# EAGLE board cn7macropad-pure (EAGLE 9.6.2)
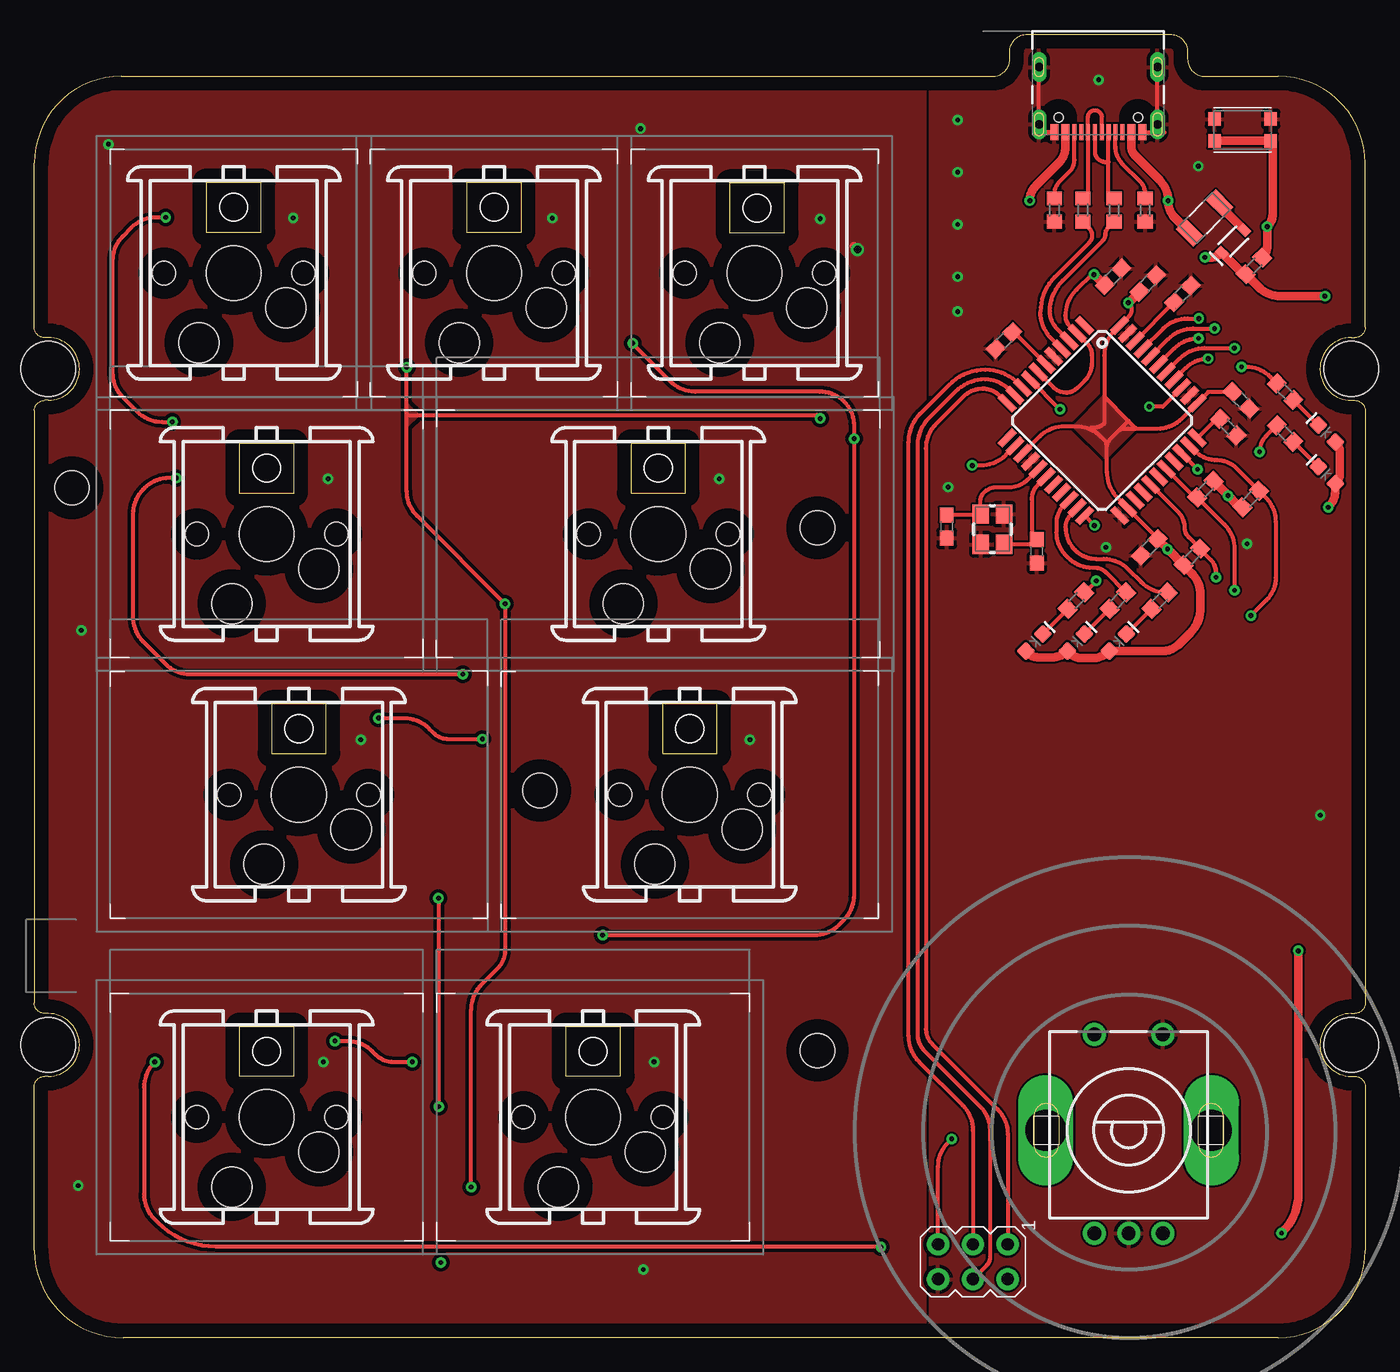
[diagram p0: board, top side]
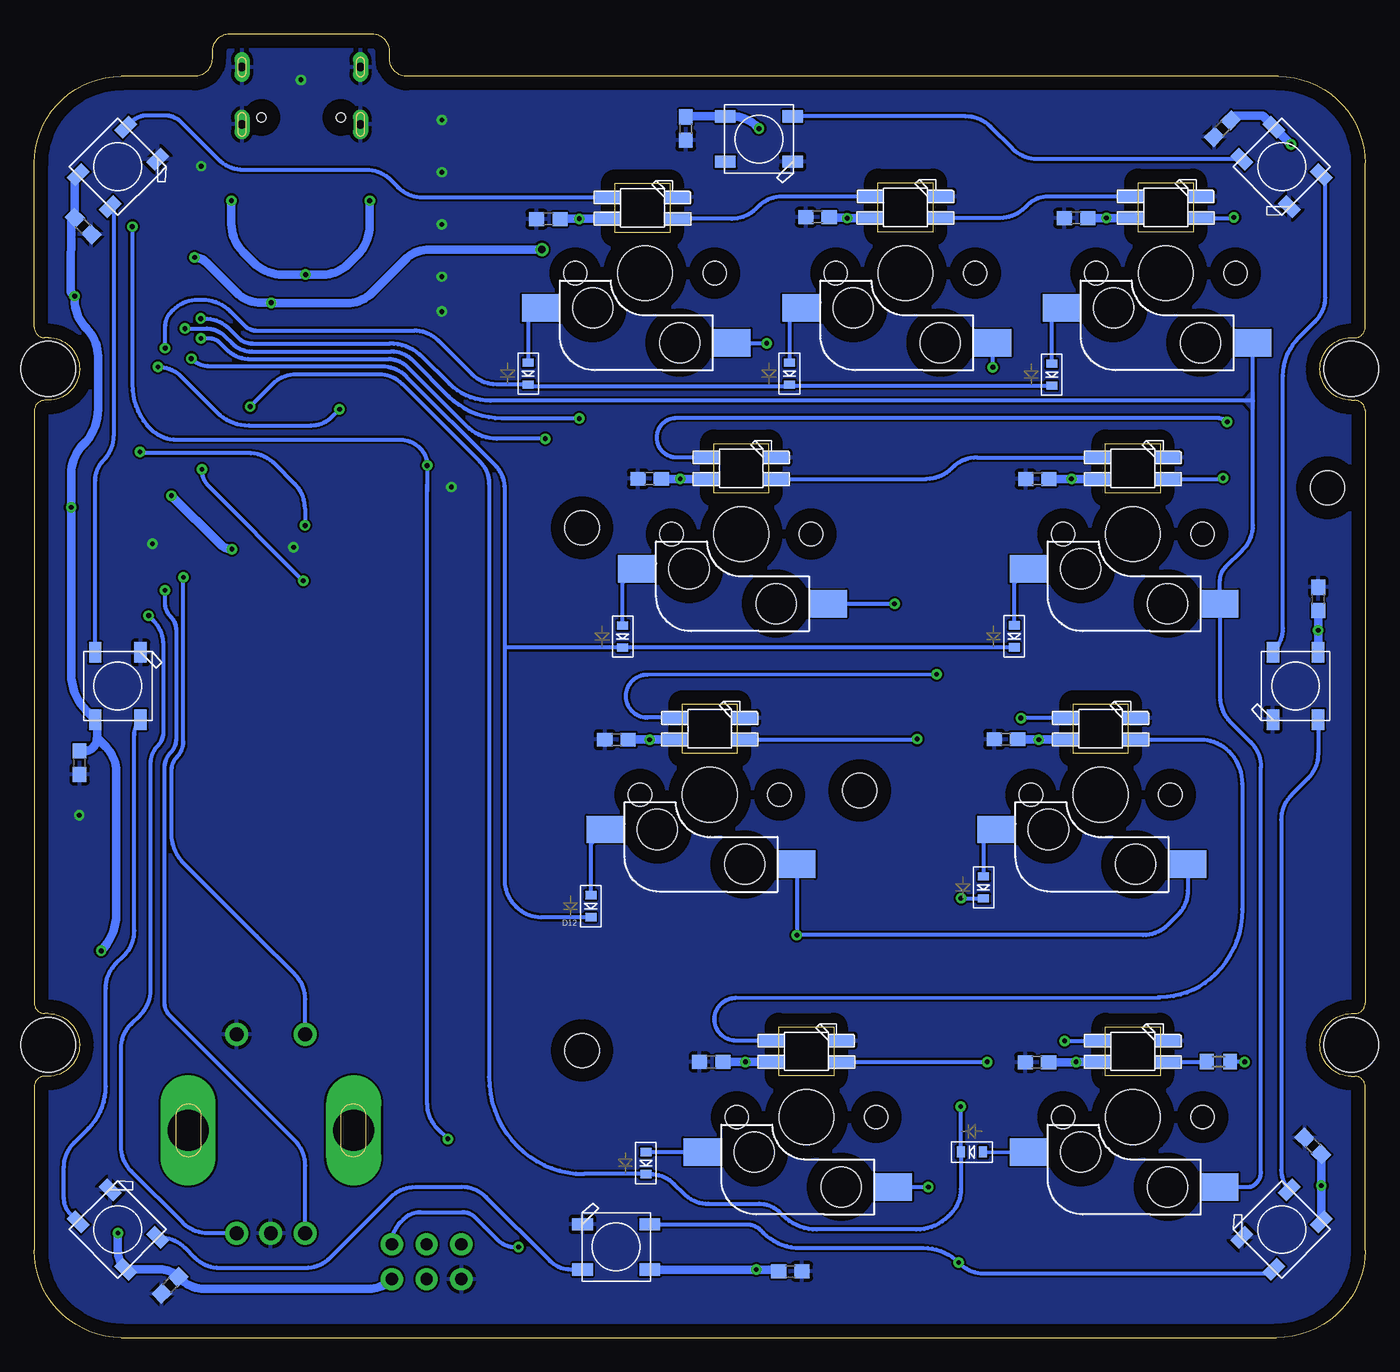
[diagram p1: board, bottom side, seen from below]

Size 97.03 x 95.01 mm. Coordinates in mm from the lower left corner, seen from the top.
Outline: 90.68,0 arc90 97.03,6.35 97.03,18.29 arc90 96.27,19.05 96.01,19.05 arc-90 93.73,21.34 arc-90 96.01,23.62 96.27,23.62 arc90 97.03,24.38 97.03,67.56 arc90 96.27,68.33 96.01,68.33 arc-90 93.73,70.61 arc-90 96.01,72.9 96.27,72.9 arc90 97.03,73.66 97.03,85.6 arc90 90.68,91.95 85.34,91.95 arc-90 84.07,93.22 84.07,93.74 arc90 82.8,95.01 72.39,95.01 arc90 71.12,93.74 71.12,93.22 arc-90 69.85,91.95 6.35,91.95 arc90 0,85.6 0,73.66 arc90 0.76,72.9 1.02,72.9 arc-90 3.3,70.61 arc-90 1.02,68.33 0.76,68.33 arc90 0,67.56 0,24.38 arc90 0.76,23.62 1.02,23.62 arc-90 3.3,21.34 arc-90 1.02,19.05 0.76,19.05 arc90 0,18.29 0,6.35 arc90 6.48,0 90.68,0
Copper layers (1*16): Top 0.035mm / dielectric 1.5mm / Bottom 0.035mm
Design rules "default *": minimum track width 6mil, minimum drill 0.35mm, track to track 6mil, track to pad 6mil, pad to pad 6mil, via to via 6mil, smd to smd 6mil, copper to edge 40mil, drill to drill 6mil, minimum pad ring 10mil, minimum via ring 8mil, stop-mask expansion 4mil, vias tented up to drill 20mil, thermal gap 10mil
Holes 2.5 mm at 36.86,39.88 57.1,59.03 57.1,20.93 2.74,61.95
Holes 4 mm at 1.02,70.61 1.02,21.34 96.01,70.61 96.01,21.34

## Footprints (pad centres in the part's own frame; a part is rotated, then mirrored left to right if it is on the bottom)
0603 = smd 1.1 x 1: 1 -0.85,0; 2 0.85,0
SOD-323 = smd 0.63 x 0.83: A 1.15,0; C -1.15,0
LED-0603 = smd 1 x 1: A -0.877,0; C 0.877,0
SOD-523 = smd 0.8 x 0.6: A 0,-0.8; K 0,0.8
AVRISP = drill 0.9 pad 1.626: 1 -1.27,2.54; 2 1.27,2.54; 3 -1.27,0; 4 1.27,0; 5 -1.27,-2.54; 6 1.27,-2.54
GCT_USB4105_REVA = smd 0.6 x 1.15: A1/B12 -3.2,4.755; A4/B9 -2.4,4.755; B1/A12 3.2,4.755; B4/A9 2.4,4.755 | smd 0.3 x 1.15: A5 -1.25,4.755; A6 -0.25,4.755; A7 0.25,4.755; A8 1.25,4.755; B5 1.75,4.755; B6 0.75,4.755; B7 -0.75,4.755; B8 -1.75,4.755 | drill 0.6 pad 1 long: G1 -4.32,0; G2 4.32,0 | drill 0.6 pad 1.05 long: G3 -4.32,4.18; G4 4.32,4.18 | hole 0.65: 2.89,3.68; -2.89,3.68
SK6812-MINI-E = smd 1.8 x 0.82 bottom: 1-VDD -2.57,0.78; 2-DOUT -2.57,-0.78; 3-GND 2.57,-0.78; 4-DIN 2.57,0.78
WS2812B = smd 1.5 x 0.9: 1-VDD 2.45,-1.65; 2-DOUT 2.45,1.65; 3-GND -2.45,1.65; 4-DIN -2.45,-1.65
R0603 = smd 1 x 1.1: 1 -0.85,0; 2 0.85,0
SW_KMR621NGLFS = smd 0.9 x 1: 1_1 -2.05,0.8; 1_2 2.05,0.8; 2_1 -2.05,-0.8; 2_2 2.05,-0.8
SWITCH_SOCKET-1.25U = smd 2.7 x 2 bottom: 1 6.355,5.08; 2 -7.625,2.54 | hole 4: 0,0 | hole 2.93: -3.81,2.54; 2.54,5.08 | hole 1.7: -5.08,0; 5.08,0
SWITCH_SOCKET-1.5U = smd 2.7 x 2 bottom: 1 6.355,5.08; 2 -7.625,2.54 | hole 4: 0,0 | hole 2.93: -3.81,2.54; 2.54,5.08 | hole 1.7: -5.08,0; 5.08,0
SWITCH_SOCKET-1.75U = smd 2.7 x 2 bottom: 1 6.355,5.08; 2 -7.625,2.54 | hole 4: 0,0 | hole 2.93: -3.81,2.54; 2.54,5.08 | hole 1.7: -5.08,0; 5.08,0
SWITCH_SOCKET-1U = smd 2.7 x 2 bottom: 1 6.355,5.08; 2 -7.625,2.54 | hole 4: 0,0 | hole 2.93: -3.81,2.54; 2.54,5.08 | hole 1.7: -5.08,0; 5.08,0
EC11B-V = drill 1 pad 1.676: A -2.5,-7.5; B 2.5,-7.5; C 0,-7.5; D -2.5,7; E 2.5,7 | drill 3 pad 3.3 long: G1 -6.032,0; G2 6.032,0
TQFP44 = smd 1.5 x 0.5: 1 -5.8,4; 2 -5.8,3.2; 3 -5.8,2.4; 4 -5.8,1.6; 5 -5.8,0.8; 6 -5.8,0; 7 -5.8,-0.8; 8 -5.8,-1.6; 9 -5.8,-2.4; 10 -5.8,-3.2; 11 -5.8,-4; 23 5.8,-4; 24 5.8,-3.2; 25 5.8,-2.4; 26 5.8,-1.6; 27 5.8,-0.8; 28 5.8,0; 29 5.8,0.8; 30 5.8,1.6; 31 5.8,2.4; 32 5.8,3.2; 33 5.8,4 | smd 0.5 x 1.5: 12 -4,-5.8; 13 -3.2,-5.8; 14 -2.4,-5.8; 15 -1.6,-5.8; 16 -0.8,-5.8; 17 0,-5.8; 18 0.8,-5.8; 19 1.6,-5.8; 20 2.4,-5.8; 21 3.2,-5.8; 22 4,-5.8; 34 4,5.8; 35 3.2,5.8; 36 2.4,5.8; 37 1.6,5.8; 38 0.8,5.8; 39 0,5.8; 40 -0.8,5.8; 41 -1.6,5.8; 42 -2.4,5.8; 43 -3.2,5.8; 44 -4,5.8
PTC1206 = smd 1.06 x 1.82: 1 -1.528,0; 2 1.528,0
CRYSTAL-SMD-3.2X2.5MM = smd 1.4 x 1.2: 1 -1.1,-0.85; 2 1.1,-0.85; 3 1.1,0.85; 4 -1.1,0.85

## Placement (x,y rotation side)
C1  10uF  [0603]  87.96,68.33 315 top
C2  1.0uF  [0603]  78.65,77.34 45 top
C3  1.0uF  [0603]  83.7,76.09 45 top
C4  1.0uF  [0603]  70.7,72.69 225 top
C5  1.0uF  [0603]  81.18,76.84 45 top
C6  1.0uF  [0603]  81.29,57.61 225 top
C7  22pF  [0603]  73.09,57.33 90 top
C8  22pF  [0603]  66.52,59.12 90 top
C9  0.1uf  [0603]  93.47,81.03 135 bottom
C10  0.1uf  [0603]  93.73,41.91 90 bottom
C11  0.1uf  [0603]  87.12,3.81 45 bottom
C12  0.1uf  [0603]  3.81,13.97 315 bottom
C13  0.1uf  [0603]  3.43,53.85 270 bottom
C14  0.1uf  [0603]  41.91,4.83 180 bottom
C15  0.1uf  [0603]  10.41,88.14 45 bottom
C16  0.1uf  [0603]  23.93,20.07 0 bottom
C17  0.1uf  [0603]  47.68,20.09 0 bottom
C18  0.1uf  [0603]  26.19,43.61 0 bottom
C19  0.1uf  [0603]  54.58,43.59 0 bottom
C20  0.1uf  [0603]  23.9,62.59 0 bottom
C21  0.1uf  [0603]  52.17,62.61 0 bottom
C22  0.1uf  [0603]  21.08,81.61 0 bottom
C23  0.1uf  [0603]  39.93,81.69 0 bottom
C24  0.1uf  [0603]  59.56,81.53 0 bottom
C25  0.1uf  [0603]  49.53,88.14 90 bottom
D1  3A/10V/280mV  [SOD-323]  87.4,79.91 45 top
D2  [LED-0603]  75.95,50.67 45 top
D3  [LED-0603]  78.99,50.67 45 top
D4  [LED-0603]  94.23,62.86 135 top
D5  [SOD-523]  22.85,70.21 180 bottom
D6  [SOD-523]  25.59,51.13 180 bottom
D7  [SOD-523]  28.68,13.53 90 bottom
D8  [SOD-523]  52.44,12.73 180 bottom
D9  [SOD-523]  54.14,51.1 180 bottom
D10  [SOD-523]  41.97,70.28 180 bottom
D11  [SOD-523]  61.02,70.28 180 bottom
D12  [SOD-523]  56.45,31.45 180 bottom
D13  [SOD-523]  27.83,32.82 180 bottom
D14  [LED-0603]  72.9,50.67 45 top
D15  [LED-0603]  94.23,65.91 135 top
ISP1  AVRISP-6  [AVRISP]  68.43,5.52 270 top
J2  USB4105_REVA  [GCT_USB4105_REVA]  77.57,92.62 180 top
LED_1  [SK6812-MINI-E]  16.94,20.86 180 top
LED_2  [SK6812-MINI-E]  40.74,20.86 180 top
LED_3  [SK6812-MINI-E]  19.29,44.38 180 top
LED_4  [SK6812-MINI-E]  47.79,44.38 180 top
LED_5  [SK6812-MINI-E]  16.94,63.38 180 top
LED_6  [SK6812-MINI-E]  45.49,63.38 180 top
LED_7  [SK6812-MINI-E]  14.54,82.4 180 top
LED_8  [SK6812-MINI-E]  33.51,82.4 180 top
LED_9  [SK6812-MINI-E]  52.7,82.34 180 top
LED_10  WS2812B5050  [WS2812B]  90.93,85.34 225 bottom
LED_11  WS2812B5050  [WS2812B]  90.93,47.5 270 bottom
LED_12  WS2812B5050  [WS2812B]  90.93,7.87 315 bottom
LED_13  WS2812B5050  [WS2812B]  54.61,6.6 0 bottom
LED_14  WS2812B5050  [WS2812B]  6.1,7.87 45 bottom
LED_15  WS2812B5050  [WS2812B]  5.08,47.5 90 bottom
LED_16  WS2812B5050  [WS2812B]  6.1,85.34 135 bottom
LED_17  WS2812B5050  [WS2812B]  44.2,87.38 180 bottom
R1  5.1k  [R0603]  74.37,82.19 270 top
R2  5.1k  [R0603]  80.98,82.19 270 top
R3  22  [R0603]  76.45,82.19 270 top
R4  22  [R0603]  78.72,82.19 270 top
R5  10k  [R0603]  88.92,78.13 45 top
R6  10k  [R0603]  88.68,61.14 225 top
R7  10k  [R0603]  85.38,61.85 45 top
R8  10k  [R0603]  84.39,56.92 225 top
R9  500  [R0603]  10.69,20.12 180 bottom
R10  200  [R0603]  78.99,53.72 225 top
R11  200  [R0603]  82.04,53.72 225 top
R12  200  [R0603]  91.19,65.91 315 top
R13  10k  [R0603]  87.05,66.37 315 top
R14  200  [R0603]  91.19,68.96 315 top
R15  200  [R0603]  75.95,53.72 225 top
S2  KMR621NGLFS  [SW_KMR621NGLFS]  88.09,88.04 0 top
SW1  KAILH1.25U  [SWITCH_SOCKET-1.25U]  16.94,16.06 180 top
SW2  KAILH1.25U  [SWITCH_SOCKET-1.25U]  40.74,16.06 180 top
SW3  KAILH1.5U  [SWITCH_SOCKET-1.5U]  19.29,39.58 180 top
SW4  KAILH1.5U  [SWITCH_SOCKET-1.5U]  47.79,39.58 180 top
SW5  KAILH1.25U  [SWITCH_SOCKET-1.25U]  16.94,58.58 180 top
SW6  KAILH1.75U  [SWITCH_SOCKET-1.75U]  45.49,58.58 180 top
SW7  KAILH  [SWITCH_SOCKET-1U]  14.54,77.6 180 top
SW8  KAILH  [SWITCH_SOCKET-1U]  33.51,77.6 180 top
SW9  KAILH  [SWITCH_SOCKET-1U]  52.51,77.6 180 top
SW10  EC11B-V-T  [EC11B-V]  79.78,15.11 0 top
U1  32U4  [TQFP44]  77.86,66.85 315 top
U$1  PTC-FUSE  [PTC1206]  85.32,81.61 45 top
Y2  [CRYSTAL-SMD-3.2X2.5MM]  69.85,58.93 90 top

## Library data of the parts
C1-C25 = kailh_cn7; PROD_ID: CAP-07876
D1 = SparkFun-DiscreteSemi; PROD_ID: DIO-14072
D2 = SparkFun-LED
D3-D11 D14 D15 LED_1-LED_9 LED_11-LED_17 R1-R15 SW1-SW10 U$1 Y2 = kailh_cn7
D12 D13 ISP1 = adafruit
J2 = USB4105_REVA; DESCRIPTION: USB-C (USB TYPE-C) USB 2.0 Receptacle Connector 24 (16+8 Dummy) Position Surface Mount, Right Angle; Through Hole; DIGI-KEY_PART_NUMBER: 2073-USB4105-GF-ACT-ND; MF: Global Connector Technology; MP: USB4105; PACKAGE: Package; PURCHASE-URL: https://pricing.snapeda.com/search/part/USB4105/?ref=eda
LED_10 = kailh_cn7; SPICEPREFIX: E
S2 = KMR621NGLFS; DESCRIPTION: Tactile Switch SPST-NO Top Actuated Surface Mount; DIGI-KEY_PART_NUMBER: CKN10684CT-ND; MF: C&K; MP: KMR621NG LFS; PACKAGE: None; PURCHASE-URL: https://pricing.snapeda.com/search/part/KMR621NG LFS/?ref=eda
U1 = SparkFun-IC-Microcontroller; PROD_ID: IC-11161

## Nets
+5V: C1.1 C5.1 C6.1 C9.2 C10.2 C11.2 C12.2 C13.2 C14.2 C15.2 C16.2 C17.2 C18.2 C19.2 C20.2 C21.2 C22.2 C23.2 C24.2 C25.2 D1.C D2.A D3.A D4.A D14.A D15.A ISP1.2 LED_1.1-VDD LED_2.1-VDD LED_3.1-VDD LED_4.1-VDD LED_5.1-VDD LED_6.1-VDD LED_7.1-VDD LED_8.1-VDD LED_9.1-VDD LED_10.1-VDD LED_11.1-VDD LED_12.1-VDD LED_13.1-VDD LED_14.1-VDD LED_15.1-VDD LED_16.1-VDD LED_17.1-VDD R5.1 R6.2 R7.2 R8.2 U1.14 U1.24 U1.34 U1.44
AREF: C3.1 U1.42
CC1: J2.A5 R2.1
CC2: J2.B5 R1.1
COL0: SW1.1 SW5.1 SW7.1 U1.41
COL1: SW2.1 SW6.1 SW8.1 U1.40
COL2: SW3.1 SW4.1 SW9.1 U1.39
D+: J2.A6 J2.B6 R3.1
D-: J2.A7 J2.B7 R4.1
D_N: R4.2 U1.3
D_P: R3.2 U1.4
GND: C1.2 C2.2 C3.2 C4.2 C5.2 C6.2 C7.1 C8.1 C9.1 C10.1 C11.1 C12.1 C13.1 C14.1 C15.1 C16.1 C17.1 C18.1 C19.1 C20.1 C21.1 C22.1 C23.1 C24.1 C25.1 ISP1.6 J2.A1/B12 J2.B1/A12 J2.G1 J2.G2 J2.G3 J2.G4 LED_1.3-GND LED_2.3-GND LED_3.3-GND LED_4.3-GND LED_5.3-GND LED_6.3-GND LED_7.3-GND LED_8.3-GND LED_9.3-GND LED_10.3-GND LED_11.3-GND LED_12.3-GND LED_13.3-GND LED_14.3-GND LED_15.3-GND LED_16.3-GND LED_17.3-GND R1.2 R2.2 R13.2 S2.1_1 S2.1_2 SW10.C SW10.E U1.5 U1.15 U1.23 U1.35 U1.43 Y2.2 Y2.4
IN-BACKLIGHT: LED_9.2-DOUT LED_10.4-DIN
LD1: R15.1 U1.31
LD2: R10.1 U1.20
LD3: R11.1 U1.21
MISO: ISP1.1 R9.1 U1.11
MOSI: ISP1.4 U1.10
N$1: R13.1 U1.33
N$2: LED_1.2-DOUT LED_2.4-DIN
N$3: D15.C R14.2
N$4: LED_2.2-DOUT LED_3.4-DIN
N$5: D14.C R15.2
N$7: D1.A U$1.2
N$8: LED_1.4-DIN R9.2
N$9: LED_3.2-DOUT LED_4.4-DIN
N$10: C7.2 U1.17 Y2.1
N$11: C8.2 U1.16 Y2.3
N$12: LED_4.2-DOUT LED_5.4-DIN
N$13: LED_5.2-DOUT LED_6.4-DIN
N$14: LED_6.2-DOUT LED_7.4-DIN
N$15: D5.A SW7.2
N$16: D6.A SW5.2
N$17: D9.A SW6.2
N$18: D10.A SW8.2
N$19: D7.A SW1.2
N$20: D8.A SW2.2
N$21: D13.A SW3.2
N$22: D12.A SW4.2
N$23: D11.A SW9.2
N$24: LED_7.2-DOUT LED_8.4-DIN
N$25: LED_8.2-DOUT LED_9.4-DIN
N$26: D2.C R10.2
N$27: D3.C R11.2
N$28: LED_10.2-DOUT LED_11.4-DIN
N$29: LED_11.2-DOUT LED_12.4-DIN
N$30: LED_13.2-DOUT LED_14.4-DIN
N$31: LED_14.2-DOUT LED_15.4-DIN
N$32: D4.C R12.2
N$33: LED_15.2-DOUT LED_16.4-DIN
N$34: LED_16.2-DOUT LED_17.4-DIN
N$35: LED_12.2-DOUT LED_13.4-DIN
PB5: R7.1 SW10.A U1.29
PC7: R6.1 SW10.B U1.32
PD7: R8.1 SW10.D U1.27
PE6: U1.1
ROW0: D5.K D10.K D11.K U1.38
ROW1: D6.K D9.K D12.K U1.37
ROW2: D7.K D8.K D13.K U1.36
RST: ISP1.5 R5.2 S2.2_1 S2.2_2 U1.13
RXLED: R14.1 U1.8
SCK: ISP1.3 U1.9
TXLED: R12.1 U1.22
UCAP: C4.1 U1.6
VBUS: C2.1 J2.A4/B9 J2.B4/A9 U1.2 U1.7 U$1.1

## Tracks (layer width: path | path; a pad name or v marks a point on that pad's centre or on a via)
+5V  (via drill 0.35, 0.55)
  Top 0.305: U1.24 79.87,60.49 | 80.28,66.31 79.78,66.82 | 79.78,66.82 78.01,68.59 | C1.1 85.59,68.93 U1.34 83.65,66.99 arc-45 81.85,66.24 79.32,66.24 arc45 79.11,66.15 | 78.12,65.17 78.19,65.23 | 78.19,65.23 78.39,65.43 | 78.39,65.43 79.11,66.15 | 79.11,66.15 79.78,66.82 | 79.78,66.82 | 77.72,65.7 77.08,66.34 77.3,66.34 arc45 77.98,66.62 arc45 78,66.69 78,71.61 arc-45 78.75,73.4 U1.44 | 87.81,60.43 R6.2 | C6.1 81.89,58.29 U1.24 | U1.24 79.02,61.17 arc-45 78.21,63.12 78.21,65 arc-45 78.39,65.43 | U1.14 73.31,65.7 arc-45 75.11,66.45 75.92,66.45 arc-45 77.72,65.7 | 77.72,65.7 78.19,65.23 | U1.44 79.33,73.98 | U1.44 79.45,74.11 | U1.44 79.82,74.48 arc45 80.01,74.93 arc45 79.8,75.44 79.79,75.45
  Top 0.61: C6.1 81.89,58.11 81.99,58.11 v82.62,57.48 83.78,56.32 arc45 R8.2 84.36,55.75 arc-45 85.01,54.18 85.01,53.17 arc-45 84.27,51.38 83.39,50.49 arc-45 82.32,50.05 D3.A arc-45 77.11,49.53 76.33,49.53 arc-45 75.51,49.87 D2.A arc-45 74.19,49.58 73.25,49.58 arc-45 72.39,49.94 D14.A | v60.02,79.32 59.77,79.58 | R7.2 87.01,61.42 arc-45 v87.03,61.38 87.72,60.69 arc45 R6.2 | v92.15,28.19 92.15,10.43 arc-45 91.03,7.71 v90.93,7.62 | v94.08,75.92 90.85,75.92 arc-45 89.27,76.58 R5.1 arc-45 88.04,77.64 D1.C arc-45 85.73,78.74 v85.34,78.74 | C5.1 79.79,75.45 arc-45 v79.76,75.44 | v94.34,60.53 arc45 94.85,61.78 D4.A arc45 95.17,63.02 95.17,64.52 arc45 D15.A
  Bottom 0.61: v5.41,87 LED_16.1-VDD 7.48,89.06 9.49,89.06 C15.2 | LED_10.1-VDD 94.09,84.52 C9.2 94.35,81.35 94.37,77.09 94.36,77.09 94.36,76.2 v94.08,75.92 94.08,75.65 arc-45 93.22,73.56 arc45 92.38,71.54 92.38,67.68 arc45 93.45,65.1 arc-45 94.34,62.95 v94.34,60.53 94.34,48.39 arc-45 93.21,45.68 LED_11.1-VDD 92.46,44.92 92.46,43.7 | LED_13.1-VDD v44.4,4.95 42.91,4.95 arc45 42.87,4.94 C14.2 | v3.2,11.07 LED_14.1-VDD | LED_14.1-VDD 3.05,8.59 | 2.94,8.7 LED_14.1-VDD | LED_15.1-VDD v3.43,51.56 C13.2 | 47.01,89.03 LED_17.1-VDD | 93.61,42.67 C10.2 93.38,42.76 arc-45 92.73,43.03 arc-45 92.46,43.7 | LED_9.1-VDD 57.27,81.56 v57.3,81.56 58.69,81.56 C24.2 | LED_7.1-VDD v18.87,81.62 C22.2 | C23.2 39.03,81.64 37.8,81.64 v37.77,81.61 37.76,81.62 LED_8.1-VDD | LED_5.1-VDD 21.4,62.6 | 21.4,62.6 v21.41,62.61 | C20.2 21.41,62.59 21.4,62.6 | LED_6.1-VDD 49.92,62.6 | 49.92,62.6 v49.94,62.61 | C21.2 51.31,62.6 49.92,62.6 | LED_3.1-VDD 23.79,43.6 | 23.79,43.6 v23.8,43.59 | C18.2 25.33,43.6 23.79,43.6 | LED_4.1-VDD 52.16,43.6 v52.17,43.59 C19.2 | LED_1.1-VDD v21.07,20.08 | v21.07,20.08 v21.08,20.09 | C16.2 21.09,20.07 v21.07,20.08 | LED_2.1-VDD v45.18,20.08 | v45.18,20.08 v45.19,20.09 | C17.2 v45.18,20.08 | v60.02,79.32 68.21,79.32 arc-45 70.01,78.58 72.43,76.16 arc45 74.23,75.41 79.69,75.41 arc45 v79.76,75.44 80.48,75.44 arc45 82.28,76.18 | v82.62,57.48 arc45 83.49,57.84 v87.03,61.38 | 71.12,4.1 ISP1.2 arc45 72.65,3.56 84.61,3.56 arc45 86.41,4.3 C11.2 arc-45 87.88,4.98 LED_12.1-VDD | LED_12.1-VDD 90.12,4.73 | LED_12.1-VDD arc45 90.93,6.34 v90.93,7.62 | v44.2,88.14 44.34,88.28 arc-45 46.14,89.03 LED_17.1-VDD | LED_17.1-VDD 49.44,89.03 arc-45 C25.2
  Bottom 0.61: 92.46,43.7 91.8,43.05 arc45 91.06,41.25 91.06,30.85 arc45 92.15,28.21 v92.15,28.19 | LED_14.1-VDD 3.2,13.34 arc-45 C12.2 | v85.34,78.74 arc45 84.48,78.38 82.28,76.18 | 82.25,76.16 82.28,76.18
  pour Top (isolate 0.254, rank 2): -4.2,94.77 -4.2,0.1 64.94,0.1 64.94,94.77
  pour Top: 75.82,66.42 78.11,64.14 80.26,66.29 77.98,68.58
AREF
  Top 0.305: U1.42 C3.1 arc45 C3.1
CC1
  Top 0.305: R2.1 80.98,83.43 arc45 80.64,84.26 79.34,85.56 arc-45 78.82,86.82 78.82,87.86 arc-45 J2.A5
CC2
  Top 0.305: R1.1 74.37,83.35 arc-45 74.76,84.29 75.47,85 arc45 75.83,85.85 J2.B5
COL0  (via drill 0.35)
  Top 0.305: v84.9,74.29 84.07,74.29 arc45 82.3,73.56 U1.41
  Bottom 0.305: 8.19,68.3 63.79,68.3 arc45 66.76,69.53 68.7,71.47 arc-45 71.1,72.47 81.13,72.47 arc45 82.17,72.9 82.81,73.54 arc-45 84.63,74.29 v84.9,74.29 | 8.19,68.3 8.19,59.21 arc45 8.93,57.42 10.19,56.16 arc-45 10.59,55.19 SW5.1 10.59,46.69 arc-45 9.84,44.89 8.34,43.39 arc45 7.59,41.59 7.59,12.07 arc45 7.92,11.28 8.01,11.2 arc45 8.53,10.98 arc-45 8.54,10.98 SW1.1 | 8.19,68.3 SW7.1
  pour Bottom: 8.18,67.69 8.79,68.3 8.18,68.91
COL1  (via drill 0.35)
  Top 0.305: v86.04,73.56 84.48,73.56 arc45 82.69,72.81 U1.40 | v31.85,10.97 31.85,23.94 arc-45 32.6,25.74 33.78,26.92 arc45 34.31,28.21 v34.31,53.49 27.9,59.91 arc-45 27.15,61.71 27.15,67.26 | 27.15,67.26 v27.15,70.74 | 27.15,67.26 57.05,67.26 v57.3,67.01
  Bottom 0.305: SW2.1 31.86,10.98 v31.85,10.97 | v34.31,53.49 39.13,53.49 SW6.1 | v27.15,70.74 SW8.1 | 57.35,67.05 v57.3,67.01 62.93,67.01 arc45 66.81,68.61 69.42,71.23 arc-45 71,71.88 81.17,71.88 arc45 82.61,72.48 83.15,73.02 arc-45 84.45,73.56 v86.04,73.56
  pour Top: 27.15,68.02 27.93,67.25 27.15,66.47
COL2  (via drill 0.35)
  Top 0.305: U1.39 83.12,72.12 arc-45 v84.87,72.85 | v43.64,72.49 arc45 43.67,72.41 46.37,69.7 arc45 48.17,68.96 57.28,68.96 arc-45 59.05,68.22 arc-45 59.78,66.48 v59.78,65.53 59.78,32.26 arc-45 59.03,30.46 58.66,30.08 arc-45 56.86,29.34 v41.43,29.34
  Bottom 0.305: SW4.1 v41.43,29.34 16.19,29.34 arc-45 14.39,30.08 13.68,30.8 arc-45 12.93,32.59 SW3.1 | SW9.1 46.12,72.49 v43.64,72.49 | v84.87,72.85 84.27,72.85 arc45 83.5,72.53 83.04,72.07 arc-45 81.24,71.32 71.21,71.32 arc45 69.8,70.74 65.5,66.44 arc-45 63.31,65.53 v59.78,65.53
D+
  Top 0.305: R3.1 76.72,83.32 76.82,83.34 J2.B6 76.82,88.98 arc-180 77.82,88.98 77.82,88.47 | 77.82,88.47 J2.A6 | 77.82,88.47 77.83,88.47
D-
  Top 0.305: R4.1 78.31,82.89 78.31,85.7 | J2.B7 78.31,87.86 78.31,85.7 | J2.A7 77.32,86.44 arc45 77.52,85.95 arc45 78.13,85.7 78.31,85.7
D_N
  Top 0.305: U1.3 74.57,73.53 arc-45 74.05,74.8 arc-45 74.98,77.07 77.89,79.98 arc45 78.08,80.43 78.08,80.44 arc-45 78.27,80.89 R4.2
D_P
  Top 0.305: 74.85,72.09 U1.4 74.19,72.79 arc-45 73.35,74.8 arc-45 74.4,77.32 76.91,79.83 arc45 77.11,80.32 arc45 76.86,80.93 R3.2
GND  (via drill 0.35)
  Top 0.305: J2.G3 81.89,91.72 | J2.G4 73.25,91.59 | J2.B1/A12 73.43,87.87 arc-45 73.23,88.37 | J2.A1/B12 82.37,87.87 arc45 82.4,87.86
  other vias: 88.42,57.86 67.31,74.8 84.86,85.39 66.62,62 77.6,91.69 93.75,38.07 78.13,57.61 67.31,77.34 67.31,81.15 67.31,84.96 67.31,88.77
  pour Top (rank 4): 65.14,-1.09 98.29,-1.09 98.29,95.15 65.14,95.15
  pour Bottom (rank 2): -2.93,96.32 -2.93,-1.35 98.92,-1.35 98.92,96.32
  pour Top (rank 4): 65.41,0.13 95.58,0.13 95.58,4.05 69.96,3.76
GND1
  pour Top (rank 3): 64.98,52 64.97,52 64.97,50.56 64.98,50.56 65.18,50.53
  pour Top (rank 3): 64.98,52.02 64.97,52.02 64.97,52.01 64.98,52
  pour Top (rank 3): 64.98,48.43 64.97,48.43 64.97,47.98 64.98,47.97
  pour Top (rank 3): 64.98,48.84 64.97,48.84 64.97,48.43
  pour Top (rank 3): 64.97,46.03 64.97,44.86 64.98,44.86
  pour Top (rank 3): 64.98,44.86 64.97,44.85 64.97,43.83 64.98,43.83
  pour Top (rank 3): 64.97,32.35 64.97,32.33 64.98,32.32
  pour Top (rank 3): 64.98,34.14 64.97,34.13 64.97,32.36 64.98,32.35
  pour Top (rank 3): 64.98,29.45 64.97,29.44 64.97,28.78 64.98,28.78
  pour Top (rank 3): 64.98,28.78 64.97,28.78 64.97,27.05 64.98,27.04
  pour Top (rank 3): 64.97,24.59 64.97,23.89 64.98,23.88
  pour Top (rank 3): 91.92,23.42 91.93,23.42 91.93,25.2 91.92,25.2
  pour Top (rank 3): 91.92,23.08 91.93,23.08 91.93,23.42 91.92,23.42
  pour Top (rank 3): 91.92,25.2 91.93,25.21 91.93,25.62
  pour Top (rank 3): 91.93,23.08 92.21,23.11 91.93,23.42
  pour Top (rank 3): 91.93,23.42 91.93,25.2 91.93,25.2
  pour Top (rank 3): 91.93,25.2 92.24,25.72 91.93,25.63 91.93,25.62
  pour Top (rank 3): 64.98,22.44 64.97,22.43 64.97,21.63 64.98,21.63
  pour Top (rank 3): 64.98,21.63 64.97,21.62 64.97,20.83 64.98,20.83
  pour Top (rank 3): 92.25,19.85 92.28,19.83 92.42,19.79
  pour Top (rank 3): 91.93,20.78 91.93,19.96 92.11,19.89 92.24,19.85 92.25,19.85 92.2,20.76
  pour Top (rank 3): 91.88,19.97 91.92,19.96 91.93,19.96 91.93,20.77 91.92,20.78
  pour Top (rank 3): 92.4,18.19 92.21,18.22 92.01,18.26 91.93,18.27 91.93,18.27 91.93,18.06 91.93,18.06
  pour Top (rank 3): 91.93,16.75 91.93,18.05 91.92,18.06
  pour Top (rank 3): 65,18.06 64.99,18.06 64.97,18.05 64.97,16.28 64.98,16.27
  pour Top (rank 3): 91.93,18.06 91.93,16.76 91.93,16.75 92.25,16.75
  pour Top (rank 3): 64.97,12.76 64.97,12.7 64.98,12.7
  pour Top (rank 3): 91.93,12.7 92.2,14.32 91.93,14.27
  pour Top (rank 3): 64.98,12.7 64.97,12.7 64.97,11.66 64.98,11.66
  pour Top (rank 3): 91.92,12.7 91.93,12.7 91.93,14.26 91.92,14.27
  pour Top (rank 3): 91.92,11.55 91.93,11.56 91.93,12.69 91.92,12.7
  pour Top (rank 3): 91.93,11.55 92.22,11.61 91.93,12.7 91.93,12.69
  pour Top (rank 3): 91.04,7.82 91.36,7.75 91.93,8.88 91.61,8.87
  pour Top (rank 3): 65.01,10.23 64.98,10.24 64.97,10.23 64.97,9.14 64.97,9.13
  pour Top (rank 3): 64.97,9.13 64.97,8.95 64.98,8.94
  pour Top (rank 3): 64.98,36.83 64.97,36.83 64.97,36.2
  pour Top (rank 3): 64.98,40.52 64.97,40.51 64.97,39.5 64.98,39.5
  pour Top (rank 3): 64.98,39.5 64.97,39.49 64.97,38.55 64.98,38.55
IN-BACKLIGHT
  Bottom 0.305: LED_10.4-DIN 90.01,88.6 arc45 88.8,89.1 87.5,89.1 arc45 86.33,88.62 83.6,85.89 arc-45 81.8,85.14 72.83,85.14 arc45 71.04,84.4 70.5,83.87 arc-45 68.71,83.12 LED_9.2-DOUT
LD1  (via drill 0.35)
  Top 0.305: U1.31 v84.8,63.3 arc45 v84.81,63.3 | R15.1 76.57,54.32 v77.42,55.17
  Bottom 0.305: v77.42,55.17 84.29,62.04 arc45 v84.81,63.3
LD2
  Top 0.305: U1.20 arc-45 U1.20 75.01,60.6 arc45 74.52,59.44 74.52,58.74 arc45 75.27,56.94 75.35,56.85 arc45 77.15,56.11 77.32,56.11 arc-45 78.16,55.76 R10.1
LD3
  Top 0.305: U1.21 arc-45 75.97,60.37 75.55,59.96 arc45 75.18,59.07 arc45 75.87,57.41 arc45 77.42,56.77 77.94,56.77 arc-45 79.74,56.02 80.7,55.07 arc45 82.49,54.32 R11.1
MISO  (via drill 0.35)
  Top 0.305: U1.11 70.42,68.64 arc45 69.12,69.17 arc45 67.73,68.59 65.72,66.59 arc45 65,64.84 65,22.5 arc45 65.44,21.43 70.22,16.64 arc-45 70.97,14.85 ISP1.1 | v8.79,20.09 8.74,20.05 arc45 8,18.25 8,10.45 arc45 8.74,8.65 8.99,8.41 arc45 13.24,6.65 61.61,6.65 arc-45 v61.72,6.6
  Bottom 0.305: v8.79,20.09 9.82,20.09 R9.1 | ISP1.1 arc45 70.28,8.46 70.1,8.64 arc45 68.88,9.14 65.79,9.14 arc45 64.92,8.79 63.25,7.11 arc-45 62.02,6.6 v61.72,6.6
MOSI
  Top 0.305: U1.10 71.05,69.13 arc45 69.31,69.86 arc45 67.17,68.97 65.18,66.98 arc45 64.39,65.08 64.39,22.12 arc45 64.89,20.91 68.93,16.87 arc-45 69.67,15.08 69.67,5.82 arc-45 69.45,5.28 ISP1.4
N$1
  Top 0.305: U1.33 86.18,66.97 R13.1
N$2  (via drill 0.35)
  Top 0.305: v21.92,21.62 22.85,21.62 arc-45 24.64,20.88 24.89,20.62 arc45 26.18,20.09 v27.56,20.09
  Bottom 0.305: v21.92,21.62 19.54,21.62 LED_1.2-DOUT | v27.56,20.09 v27.57,20.08 LED_2.4-DIN
N$3
  Top 0.305: D15.C R14.2
N$4
  Bottom 0.305: LED_2.2-DOUT 45.88,21.64 arc180 45.88,24.77 15.06,24.82 14.94,24.82 arc-45 10.93,26.48 arc-45 8.97,31.21 8.97,40.38 arc-45 9.95,42.75 arc-45 12.01,43.6 LED_3.4-DIN
N$5
  Top 0.305: D14.C R15.2
N$7
  Top 0.61: D1.A 86.51,82.43 arc-45 U$1.2
N$8
  Bottom 0.305: LED_1.4-DIN 11.58,20.08 R9.2
N$9  (via drill 0.35)
  Top 0.305: v25.09,45.16 26.96,45.16 arc-45 28.76,44.42 29.08,44.09 arc45 30.19,43.64 v32.66,43.64
  Bottom 0.305: LED_3.2-DOUT v25.09,45.16 | v25.09,45.16 | LED_4.4-DIN 32.7,43.6 v32.66,43.64
N$10
  Top 0.305: Y2.1 72.74,57.83 C7.2 72.71,58.56 72.71,61.11 arc-45 73.14,62.13 U1.17
N$11
  Top 0.305: U1.16 72.4,62.53 arc-45 71.07,61.98 70.14,61.98 arc45 69.22,61.59 arc45 68.95,60.95 68.95,59.97 | Y2.3 68.95,59.97 | 68.95,59.97 C8.2
N$12  (via drill 0.35)
  Top 0.305: v31.24,48.36 11.37,48.36 arc-45 9.57,49.11 7.93,50.74 arc-45 7.19,52.54 7.19,60.03 arc-45 7.93,61.83 8.03,61.92 arc-45 9.8,62.66 v10.36,62.66
  Bottom 0.305: LED_5.4-DIN 10.43,62.6 v10.36,62.66 | LED_4.2-DOUT arc-45 50.42,45.19 52.32,45.19 arc180 52.32,48.34 v31.24,48.36
N$13
  Bottom 0.305: LED_5.2-DOUT 28.31,64.16 arc-45 30.11,63.41 30.18,63.34 arc45 31.98,62.6 LED_6.4-DIN
N$14  (via drill 0.35)
  Top 0.305: v9.58,81.66 8.88,81.66 arc45 7.08,80.92 6.43,80.27 arc45 5.69,78.48 5.69,70.37 arc45 6.43,68.57 7.51,67.5 arc45 9.31,66.75 v10.06,66.75
  Bottom 0.305: LED_7.4-DIN 9.61,81.62 v9.58,81.66 | LED_6.2-DOUT 50.19,64.16 arc180 50.19,67.06 10.85,67.06 arc42 v10.06,66.75
N$15
  Bottom 0.305: D5.A 22.85,74.38 SW7.2
N$16
  Bottom 0.305: D6.A 25.59,55.01 SW5.2
N$17
  Bottom 0.305: D9.A 54.14,55.01 SW6.2
N$18
  Bottom 0.305: SW8.2 41.97,74.23 D10.A
N$19
  Bottom 0.305: D7.A SW1.2
N$20
  Bottom 0.305: SW2.2 D8.A
N$21
  Bottom 0.305: SW3.2 27.83,36.13 D13.A
N$22
  Bottom 0.305: D12.A 56.45,36 SW4.2
N$23
  Bottom 0.305: SW9.2 61.02,74.18 D11.A
N$24
  Bottom 0.305: LED_8.4-DIN 26.62,81.62 arc-45 24.82,82.37 24.64,82.55 arc45 23.11,83.18 LED_7.2-DOUT
N$25
  Bottom 0.305: LED_8.2-DOUT 42.48,83.18 arc-45 44.28,82.44 44.42,82.3 arc45 46.2,81.56 LED_9.4-DIN
N$26
  Top 0.305: R10.2 D2.C
N$27
  Top 0.305: D3.C R11.2
N$28
  Bottom 0.305: LED_11.4-DIN 92.58,62.49 arc45 91.97,63.96 arc-45 91.24,65.72 91.24,82.19 LED_10.2-DOUT
N$29
  Bottom 0.305: LED_11.2-DOUT arc-45 89.74,43.95 89.74,29.65 arc45 90.48,27.86 91.08,27.26 arc-45 91.82,25.46 91.82,18.28 arc45 93.07,15.26 94.12,14.21 arc-45 94.87,12.41 94.87,10.16 arc-45 94.39,8.99 LED_12.4-DIN
N$30  (via drill 0.35)
  Bottom 0.305: LED_14.4-DIN 6.97,4.67 | LED_13.2-DOUT 45.07,8.25 arc45 44.09,7.85 43.9,7.65 arc-45 41.18,6.53 32.22,6.53 arc45 v29.64,5.46 29.6,5.42 arc-45 27.8,4.67 7.39,4.67 arc-45 LED_14.4-DIN | 6.9,4.88 arc-45 LED_14.4-DIN
N$31
  Bottom 0.305: LED_15.4-DIN 3.43,42.55 arc45 4.17,40.76 5.38,39.55 arc-45 6.12,37.76 6.12,12.2 arc-45 LED_14.2-DOUT
N$32
  Top 0.305: D4.C R12.2
N$33
  Bottom 0.305: 3.05,84.63 LED_16.4-DIN arc45 2.92,84.11 2.92,75.86 arc45 3.67,74.06 4.84,72.88 arc-45 5.99,70.1 5.99,51.72 arc45 LED_15.2-DOUT
N$34
  Bottom 0.305: LED_16.2-DOUT 23.9,85.91 arc45 25.69,86.65 27.32,88.28 arc-45 29.12,89.03 LED_17.4-DIN
N$35
  Bottom 0.305: LED_12.2-DOUT 87.86,7.31 arc45 86.07,6.56 85.33,5.82 arc-45 83.53,5.08 77.25,5.08 arc-45 75.46,5.82 71.05,10.23 arc45 69.25,10.97 65.87,10.97 arc45 64.08,10.23 59.44,5.59 arc-45 57.91,4.95 LED_13.4-DIN
PB5  (via drill 0.35)
  Top 0.305: 82.6,63.32 U1.29 84.46,61.38 arc45 R7.1 86.76,59.27 arc-45 87.5,57.47 v87.5,54.48
  Bottom 0.305: SW10.A 77.28,12.55 arc-45 78.02,14.34 87.15,23.48 arc45 87.55,24.44 87.55,41.51 arc45 87.07,42.67 arc-45 86.67,43.65 86.67,51.58 arc-45 87.05,52.5 arc45 87.5,53.61 v87.5,54.48
PC7  (via drill 0.35)
  Top 0.305: R6.1 89.61,61.74 89.65,61.71 | R6.1 87.66,63.37 arc45 86.23,63.96 arc-45 84.6,64.63 U1.32 | R6.1 89.76,61.27 arc-45 90.5,59.47 90.5,55.38 arc-45 89.83,53.76 v88.7,52.63
  Bottom 0.305: v88.7,52.63 88.35,52.28 arc45 87.61,50.48 87.61,44.14 arc45 88.01,43.15 arc-45 88.54,41.87 88.54,25.34 arc45 89.29,23.54 89.96,22.87 arc-45 90.7,21.07 90.7,13.93 arc-45 89.96,12.13 86.18,8.35 arc-45 84.38,7.61 SW10.B
PD7  (via drill 0.35)
  Top 0.305: 81.41,62.18 arc45 U1.27 83.41,60.17 arc-45 83.87,59.05 arc45 84.16,58.35 R8.1 | R8.1 84.99,57.65 | v86.16,55.42 86.16,55.77 arc45 85.78,56.69 85.03,57.44 arc-45 R8.1
  Bottom 0.305: v86.16,55.42 86.16,43.45 arc45 86.61,42.34 arc-45 87.05,41.3 87.05,36.79 arc-45 86.12,34.56 80.81,29.25 78.02,26.46 arc45 77.28,24.67 SW10.D
ROW0  (via drill 0.35)
  Top 0.305: v87.49,72.14 85.32,72.14 arc45 83.53,71.39 U1.38
  Bottom 0.305: D5.K 41.9,69.41 D10.K 42.13,69.33 60.66,69.33 arc45 D11.K 63.32,69.48 arc45 65.12,70.23 67.56,72.66 arc-45 69.35,73.41 80.8,73.41 arc45 81.71,73.78 82.75,74.83 arc-45 84.78,75.67 85.11,75.67 arc-45 86.9,74.92 87.02,74.8 arc-45 87.49,73.67 v87.49,72.14
ROW1  (via drill 0.35)
  Top 0.305: U1.37 83.97,70.7 arc-45 v85.58,71.37
  Bottom 0.305: D6.K 54.12,50.33 D9.K 62.71,50.3 arc-45 62.74,50.29 | v85.58,71.37 arc-45 84.24,70.81 71.7,70.81 arc45 69.91,70.07 63.48,63.65 arc45 62.74,61.85 62.74,50.29 | D12.K 60.07,30.64 arc45 61.87,31.39 61.99,31.51 arc45 62.74,33.31 62.74,50.29
ROW2  (via drill 0.35)
  Top 0.305: U1.36 82.27,67.87 v81.29,67.87 | v29.46,32.03 29.49,32 v29.49,16.84
  Bottom 0.305: v29.49,16.84 29.48,16.83 D7.K 29.48,10.82 arc45 30.22,9.02 30.4,8.84 arc45 32.73,7.87 39.98,7.87 arc45 42.45,8.9 42.69,9.14 arc-45 44.18,9.75 47.89,9.75 arc45 49.69,10.5 50.37,11.18 arc-45 52.17,11.92 D8.K 56.96,11.92 arc45 61.79,13.93 arc45 63.88,18.97 63.88,62.27 arc-45 64.53,63.85 70.23,69.55 arc-45 71.89,70.23 77.95,70.23 arc-45 79.62,69.54 v81.29,67.87 | v29.46,32.03 27.84,32.03 D13.K
RST  (via drill 0.35)
  Top 0.305: U1.13 70.8,64.32 arc-45 69,63.58 v68.38,63.58 | ISP1.5 65.89,12.43 arc-45 66.63,14.23 v66.88,14.48
  Top 0.61: S2.2_1 S2.2_2 90.29,87.08 90.29,81.94 arc-45 89.9,81 v89.88,80.98 89.88,79.61 arc-45 R5.2
  Bottom 0.305: v89.87,80.97 v89.88,80.98 89.88,69.46 arc-45 88.55,66.24 arc-45 86.66,65.46 70.35,65.46 arc45 68.94,64.87 68.91,64.84 arc45 v68.38,63.58 68.38,61.73 arc-45 68.38,61.72 | v66.88,14.48 67.63,15.23 arc45 68.38,17.03 68.38,61.72 | 68.38,61.72 68.38,62.23
RXLED  (via drill 0.35)
  Top 0.305: R14.1 90.13,70.02 arc45 88.33,70.76 v88.01,70.76 | v74.78,67.67 U1.8 arc-45 U1.8
  Bottom 0.305: v88.01,70.76 arc45 86.32,70.06 83.72,67.46 arc-45 81.39,66.5 76.86,66.5 arc-45 75.3,67.14 v74.78,67.67
SCK
  Top 0.305: U1.9 71.77,69.54 arc45 69.34,70.55 arc45 66.68,69.45 64.56,67.33 arc45 63.73,65.32 63.73,21.97 arc45 64.5,20.11 67.68,16.92 arc-45 68.43,15.13 ISP1.3
TXLED  (via drill 0.35)
  Top 0.305: R12.1 89.82,65.75 arc45 v89.33,64.57 | v77.29,59.21 U1.22 arc-45 U1.22
  Bottom 0.305: v77.29,59.21 77.29,60.44 arc-45 78.04,62.24 79.44,63.64 arc-45 81.48,64.49 89.15,64.49 arc45 v89.33,64.57
UCAP
  Top 0.305: U1.6 71.42,73.29 C4.1
VBUS  (via drill 0.35)
  Top 0.305: U1.7 74.33,69.25 arc45 75.21,68.89 arc45 76.03,69.23 76.58,69.77 arc45 77.09,71 77.09,71.62 arc45 76.72,72.52 U1.2 75.48,73.75 arc-45 75.18,74.47 arc-45 75.97,76.38 77.09,77.5 v77.25,77.5
  Top 0.61: 72.54,82.91 v72.57,82.88 arc-45 73.02,83.97 74.71,85.65 arc45 75.17,86.78 J2.B4/A9 | 77.99,76.74 C2.1 77.32,77.47 arc-45 v77.25,77.5 | J2.A4/B9 79.97,86.86 arc45 80.26,86.16 82.04,84.38 arc-45 v82.66,82.88 arc45 83.21,81.56 U$1.1
  Bottom 0.61: v72.57,82.88 72.57,81.13 arc45 73.5,78.9 74.16,78.24 arc45 75.96,77.5 v77.25,77.5 78.93,77.5 arc45 81.03,78.37 81.81,79.14 arc45 82.66,81.2 v82.66,82.88